# Altium PCB 第十二届直立摄像头.PcbDoc (part 3 of 3)
Units mil, origin at the board's own origin, x right, y up, seen from the top; angles counter-clockwise.
Board outline 3925 x 2095 mil, 2 copper layers (Top Layer, Bottom Layer); 127 components, 103 nets, 557 pads, 326 vias.
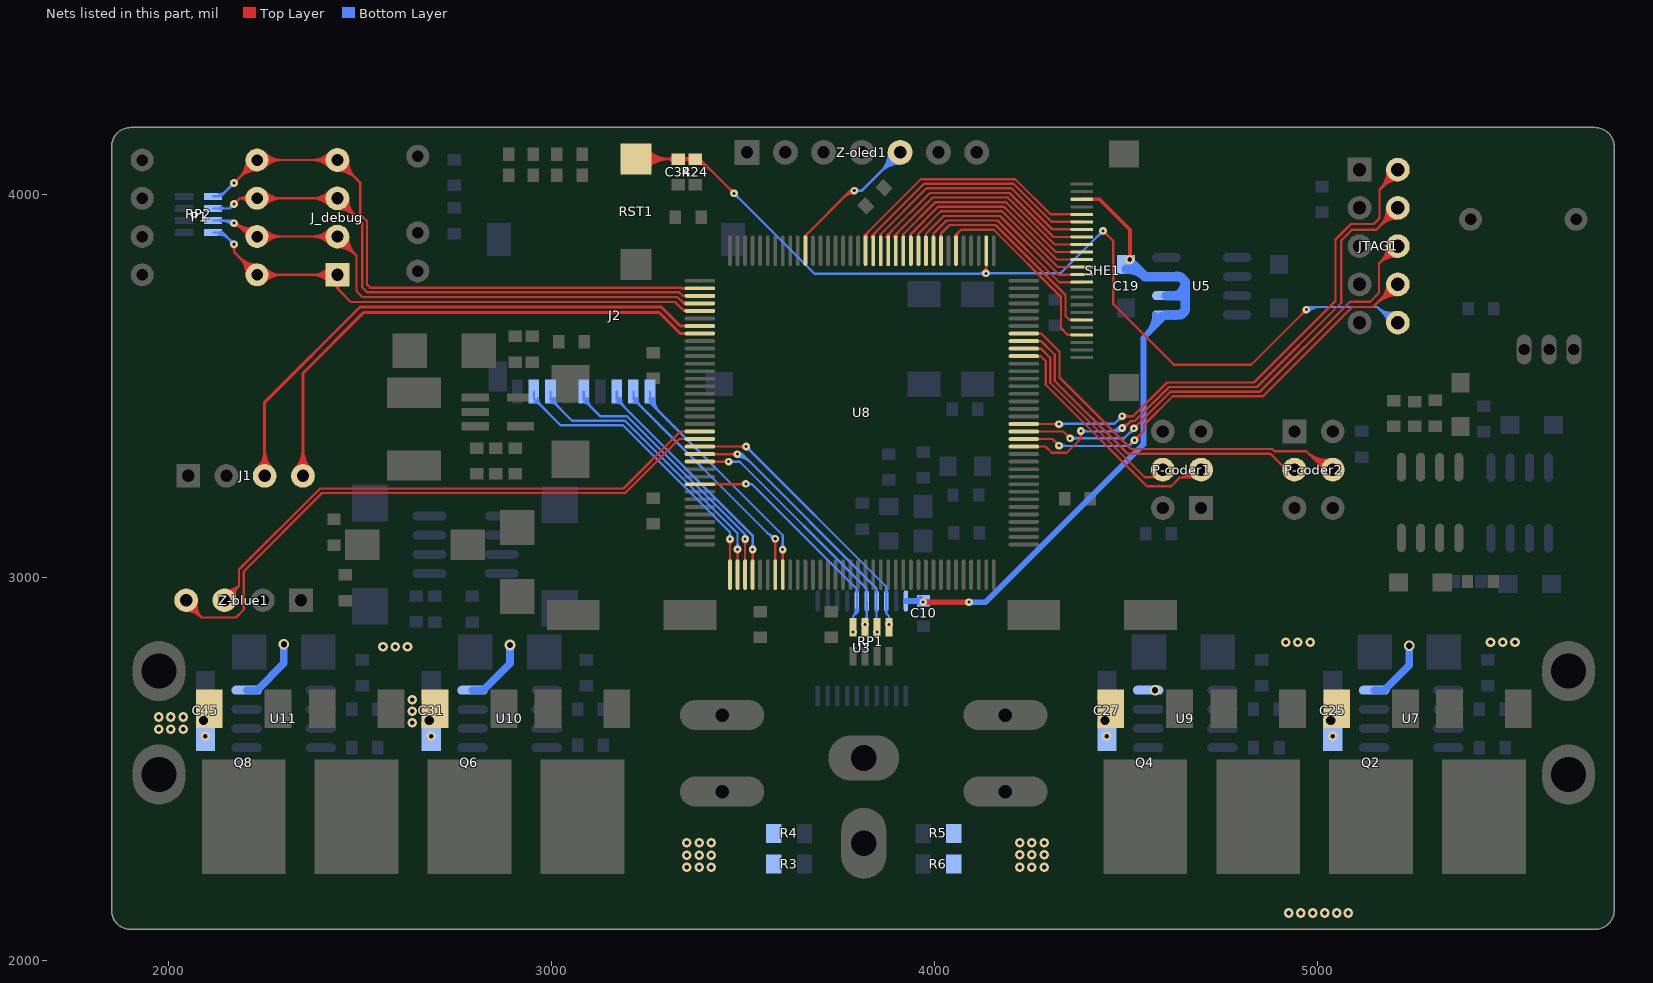
[diagram p3: the nets of this part, all layers, seen from the top]

## Via types
v1: diameter 31.5, hole 19.68, Top Layer to Bottom Layer, 160 vias
v2: diameter 25, hole 12, Top Layer to Bottom Layer, 66 vias
v3: diameter 20, hole 8, Top Layer to Bottom Layer, 61 vias
v4: diameter 40, hole 24, Top Layer to Bottom Layer, 20 vias
v5: diameter 28, hole 16, Top Layer to Bottom Layer, 14 vias
v6: diameter 12, hole 8, Top Layer to Bottom Layer, 3 vias
v7: diameter 39.37, hole 39.37, Top Layer to Bottom Layer, 2 vias

## Nets (pads, with @x,y where several pads share a name; then routed paths per layer and width w, separated by ;. In a path a pad name is that pad's centre, name@x,y a point inside that pad or via, vN(x,y) a via of type N, cw(c..) or ccw(c..) an arc to the next point about the centre after c; other vN are vias at no path point) (continued)
PA0_TCK: JTAG1.9 U8.50 | length 1768.7
  Top Layer w6: U8.50@4233.49,3341 U8.50@4233.07,3341.42 4289.58,3341.42 4306,3325 4345,3325 4382,3362 v3(4382,3382) ; v3@4377.05,3377.05 cw(c4365.1,3365.1) 4382,3365.1 cw(c4398.9,3365.1) v3@4386.95,3377.05 ; v3(4490,3390) 4495.13,3390 4513.13,3408 4523,3408 4612,3497 4842,3497 5062,3717 5062,3880 5090,3908 5154,3908 5197,3951 JTAG1.9@5211,3951 ; v3@4490,3391 ccw(c4490,3405.8) 4500.46,3395.33 ; v3@4490,3397 ccw(c4490,3426.28) 4510.71,3405.58 ; 5161.49,3915.49 ccw(c5111.99,3965) JTAG1.9@5182,3965 ; 5163.91,3917.91 cw(c5210,3871.82) JTAG1.9@5210,3937 ; 5171.74,3925.74 ccw(c5132.47,3965) JTAG1.9@5188,3965 ; 5174.15,3928.15 cw(c5210,3892.3) JTAG1.9@5210,3943 ; 5181.98,3935.98 ccw(c5152.96,3965) JTAG1.9@5194,3965 ; 5184.39,3938.39 cw(c5210,3912.79) JTAG1.9@5210,3949
  Bottom Layer w6: v3(4382,3382) 4383,3381 4481,3381 v3(4490,3390) ; v3@4386.95,3377.05 cw(c4396.49,3367.51) 4396.49,3381 ; v3@4386.95,3386.95 ccw(c4401.31,3401.31) 4401.31,3381 ; 4451.37,3381 ccw(c4451.37,3428.63) v3@4485.05,3394.95 ; 4465.86,3381 ccw(c4465.86,3414.14) v3@4489.29,3390.71 ; 4480.34,3381 ccw(c4480.34,3399.66) v3@4493.54,3386.46
PA1_TD1: JTAG1.7 U8.51 | length 1534.1
  Top Layer w6: U8.51@4233.07,3361.1 4307.9,3361.1 v3(4325,3344) ; v3@4318,3344 ccw(c4301.1,3344) 4313.05,3355.95 ccw(c4325,3367.9) v3@4325,3351 ; v3(4522,3358) 4547,3383 4547,3398 4622,3473 4858,3473 5091,3706 5145,3706 JTAG1.7@5207,3768 ; v3@4522,3365 ccw(c4522,3381.9) 4533.95,3369.95 ccw(c4545.9,3358) v3@4529,3358 ; 5151.96,3712.96 cw(c5210,3654.92) JTAG1.7@5210,3737 ; 5162.2,3723.2 cw(c5210,3675.4) JTAG1.7@5210,3743 ; 5166.44,3727.44 ccw(c5128.89,3765) JTAG1.7@5182,3765 ; 5172.44,3733.44 cw(c5210,3695.89) JTAG1.7@5210,3749 ; 5176.69,3737.69 ccw(c5149.37,3765) JTAG1.7@5188,3765 ; 5182.69,3743.69 cw(c5210,3716.37) JTAG1.7@5210,3755
  Bottom Layer w6: v3(4325,3344) 4326,3343 4507,3343 v3(4522,3358) ; v3@4329.95,3339.05 cw(c4339.49,3329.51) 4339.49,3343 ; v3@4329.95,3348.95 ccw(c4344.31,3363.31) 4344.31,3343 ; v3@4515,3358 cw(c4498.1,3358) 4510.05,3346.05 cw(c4522,3334.1) v3@4522,3351
PA2_TDO: JTAG1.8 U8.52 | length 1543.6
  Top Layer w6: U8.52@4233.07,3380.79 4336.21,3380.79 v3(4354,3363) ; v3@4347,3363 ccw(c4330.1,3363) 4342.05,3374.95 ccw(c4354,3386.9) v3@4354,3370 ; v3(4521,3389) 4617,3485 4850,3485 5085,3720 5138,3720 5161,3743 5161,3820 ; 5165.03,3824.03 ccw(c5124.06,3865) JTAG1.8@5182,3865 ; 5170.15,3829.15 cw(c5204.17,3795.13) JTAG1.8@5208.17,3843.08 ; 5175.27,3834.27 ccw(c5144.54,3865) JTAG1.8@5188,3865 ; 5179.3,3838.3 cw(c5205.58,3812.01) JTAG1.8@5208.67,3849.06 ; 5185.51,3844.51 ccw(c5165.03,3865) JTAG1.8@5194,3865 ; JTAG1.8@5207.67,3837.1 ccw(c5202.76,3778.24) 5161,3820 ; JTAG1.8@5208,3867 5161,3820
  Bottom Layer w6: v3(4354,3363) 4495,3363 v3(4521,3389) ; v3@4358.95,3358.05 cw(c4370.9,3346.1) 4370.9,3363 cw(c4370.9,3379.9) v3@4358.95,3367.95 ; v3@4514,3389 cw(c4497.1,3389) 4509.05,3377.05 cw(c4521,3365.1) v3@4521,3382
PA3_TMS: JTAG1.10 U8.53 | length 1707
  Top Layer w6: U8.53@4233.07,3400.47 v3@4325,3400.47 ; 4306.96,3400.47 cw(c4306.96,3381.96) v3@4320.05,3395.05 ; 4309.24,3400.47 ccw(c4309.24,3415.76) v3@4320.05,3404.95 ; v3(4490,3421) 4519.03,3421 4607.03,3509 4834,3509 5047,3722 5047,3882 5088,3923 5147,3923 5162,3938 5162,4012 ; v3@4494.95,3416.05 cw(c4506.9,3404.1) 4506.9,3421 cw(c4506.9,3437.9) v3@4494.95,3425.95 ; 5170.74,4020.74 cw(c5210,3981.47) JTAG1.10@5210,4037 ; 5171.61,4021.61 ccw(c5131.84,4061.38) JTAG1.10@5188.02,4063.98 ; 5180.98,4030.98 cw(c5210,4001.96) JTAG1.10@5210,4043 ; 5181.22,4031.22 ccw(c5150.2,4062.23) JTAG1.10@5194.02,4064.26 ; JTAG1.10@5182.03,4063.7 cw(c5113.47,4060.53) 5162,4012 ; JTAG1.10@5211,4051 5201,4051 5162,4012
  Bottom Layer w6: v3(4325,3400) 4326,3401 4470,3401 v3(4490,3421) ; v3@4329.95,3395.05 cw(c4344.31,3380.69) 4344.31,3401 ; v3@4329.95,3404.95 ccw(c4339.49,3414.49) 4339.49,3401 ; v3@4483,3421 cw(c4466.1,3421) 4478.05,3409.05 cw(c4490,3397.1) v3@4490,3414
PA10_FTM2_CH0: P-coder1.2 U8.62 | length 836.5
  Top Layer w6: U8.62@4233.07,3577.64 4277.36,3577.64 4290,3565 4290,3503.09 4555.09,3238 4618,3238 4640.5,3260.5 ; 4647.37,3260.5 ccw(c4647.37,3287.58) P-coder1.2@4674.2,3283.95 ; 4654.23,3260.5 ccw(c4654.23,3286.65) P-coder1.2@4680.14,3283.14 ; 4661.1,3260.5 ccw(c4661.1,3285.72) P-coder1.2@4686.09,3282.34 ; 4667.96,3260.5 ccw(c4667.96,3284.79) P-coder1.2@4692.04,3281.54 ; P-coder1.2@4668.25,3284.75 cw(c4640.5,3288.5) 4640.5,3260.5 ; P-coder1.2@4695.5,3260.5 4640.5,3260.5
PA11_CODER2DIR: P-coder1.5 U8.63 | length 540.3
  Top Layer w6: U8.63@4233.07,3597.32 4277.68,3597.32 4302,3573 4302,3508.06 4549.06,3261 P-coder1.5@4596,3261
PA12_FTM1_CH0: P-coder2.2 U8.64 | length 894.6
  Top Layer w6: U8.64@4233.07,3617.01 4277.99,3617.01 4314,3581 4314,3513.03 4504.03,3323 4877,3323 P-coder2.2@4940,3260
PA13_CODER1DIR: P-coder2.5 U8.65 | length 1287.4
  Top Layer w6: U8.65@4233.07,3636.69 4278.31,3636.69 4326,3589 4326,3522.13 4513.13,3335 4881.97,3335 4887.97,3329 4971,3329 ; 4979.19,3320.81 ccw(c5025.23,3366.84) P-coder2.5@5036.27,3302.68 ; 4987.38,3312.62 ccw(c5027.63,3352.86) P-coder2.5@5037.29,3296.77 ; 4995.58,3304.42 ccw(c5030.04,3338.89) P-coder2.5@5038.3,3290.86 ; 5003.77,3296.23 ccw(c5032.44,3324.91) P-coder2.5@5039.32,3284.94 ; 5007.05,3292.95 cw(c4995.1,3281) P-coder2.5@5012,3281 ; P-coder2.5@5035.25,3308.59 cw(c5022.82,3380.82) 4971,3329 ; P-coder2.5@5040,3260 4971,3329
PC10_I2C1_SCL: J1.3 U8.115 | length 1627.1
  Top Layer w8: J1.3@2230.91,3284.09 ccw(c2184.82,3330.18) 2250,3330.18 ccw(c2315.18,3330.18) J1.3@2269.09,3284.09 ; J1.3@2236.56,3278.44 ccw(c2204.13,3310.87) 2250,3310.87 ccw(c2295.87,3310.87) J1.3@2263.44,3278.44 ; J1.3@2250,3265 2250,3457 2499,3706 3286,3706 3335.62,3656.38 U8.115@3386.93,3656.38
PC11_I2C1_SDA: J1.4 U8.116 | length 1568.1
  Top Layer w8: J1.4@2330.91,3284.09 ccw(c2284.82,3330.18) 2350,3330.18 ccw(c2415.18,3330.18) J1.4@2369.09,3284.09 ; J1.4@2336.56,3278.44 ccw(c2304.13,3310.87) 2350,3310.87 ccw(c2395.87,3310.87) J1.4@2363.44,3278.44 ; J1.4@2350,3265 2350,3533 2509,3692 3280.2,3692 3335.51,3636.69 U8.116@3386.93,3636.69
PCLK: SHE1.21 U8.78 | length 560.2
  Top Layer w6: U8.78@4052.06,3888.07 cw(c4059.29,3888.07) 4054.18,3893.18 ; U8.78@4056.06,3853.07 4056.06,3895.06 4069,3908 4154.36,3908 4330,3732.36 4330,3651 4347.85,3633.15 SHE1.21@4384.69,3633.15 ; U8.78@4058.06,3888.07 cw(c4079.77,3888.07) 4064.42,3903.42
PD2_UART2_RX: U8.129 Z-blue1.3 | length 1569.7
  Top Layer w6: Z-blue1.3@2145,2960 2165,2960 2183,2978 ; Z-blue1.3@2148.84,2961.66 ccw(c2153.98,2990.73) 2174.86,2969.86 ccw(c2195.73,2948.98) Z-blue1.3@2166.66,2943.84 ; Z-blue1.3@2149.88,2967.57 ccw(c2156.43,3004.56) 2183,2978 ; Z-blue1.3@2172.57,2944.88 cw(c2209.56,2951.43) 2183,2978 ; U8.129@3386.93,3380.79 3335.79,3380.79 3187,3232 2395.03,3232 2183,3019.97 2183,2978
PD3_UART2_TX: U8.130 Z-blue1.4 | length 1786.6
  Top Layer w6: Z-blue1.4@2045,2912 cw(c2045,2856.47) 2084.26,2895.74 ; Z-blue1.4@2045,2918 cw(c2045,2876.96) 2074.02,2905.98 ; Z-blue1.4@2050,2930 2085,2895 ; Z-blue1.4@2060.74,2937.12 ccw(c2089.51,2931.85) 2068.83,2911.17 ; Z-blue1.4@2066.64,2936.04 ccw(c2103.18,2929.35) 2076.91,2903.09 ; Z-blue1.4@2072.54,2934.96 ccw(c2116.85,2926.85) 2085,2895 ; U8.130@3386.93,3361.1 3333.07,3361.1 3191.97,3220 2400,3220 2195,3015 2195,2915 2175,2895 2085,2895
PD4_TPM0_CH4: RP1.2 U3.18 U8.131 | length 841.4
  Top Layer w6: U8.131@3386.93,3341.42 v3(3507.58,3341.42) ; v3@3502.63,3336.47 ccw(c3490.68,3324.52) 3490.68,3341.42 ccw(c3490.68,3358.32) v3@3502.63,3346.37
  Bottom Layer w6: v3@3507.58,3334.42 cw(c3507.58,3317.52) 3519.53,3329.47 cw(c3531.48,3341.42) v3@3514.58,3341.42 ; v3(3507.58,3341.42) 3873.82,2975.18 U3.18@3873.82,2938.03 3873.82,2905.18 3881,2898 v3(3881,2877) ; U3.18@3871.76,2914.32 cw(c3866.8,2909.36) 3873.82,2909.36 cw(c3880.83,2909.36) U3.18@3875.87,2914.32 ; U3.18@3871.76,2961.74 ccw(c3866.8,2966.7) 3873.82,2966.7 ccw(c3880.83,2966.7) U3.18@3875.87,2961.74 ; v3@3876.05,2881.95 ccw(c3864.1,2893.9) 3881,2893.9 ccw(c3897.9,2893.9) v3@3885.95,2881.95
PD5_TPM0_CH5: RP1.4 U3.17 U8.132 | length 888.6
  Top Layer w6: U8.132@3386.93,3321.73 v3(3484.73,3321.73) ; v3@3479.78,3316.78 ccw(c3467.83,3304.83) 3467.83,3321.73 ccw(c3467.83,3338.63) v3@3479.78,3326.68
  Bottom Layer w6: v3@3484.73,3314.73 cw(c3484.73,3267.57) 3518.08,3300.92 ; v3@3484.73,3320.73 cw(c3484.73,3288.05) 3507.84,3311.16 ; v3(3484.73,3321.73) 3497.27,3321.73 ; v3@3484.73,3326.73 cw(c3484.73,3308.54) 3497.6,3321.4 ; v3@3490.69,3318.06 cw(c3497.27,3314.01) 3497.27,3321.73 ; v3@3490.69,3325.4 ccw(c3497.27,3329.46) 3497.27,3321.73 ; v3@3844.05,2861.95 ccw(c3833.96,2872.04) 3848.23,2872.04 ; U3.17@3846.17,2914.32 cw(c3841.21,2909.36) 3848.23,2909.36 cw(c3855.24,2909.36) U3.17@3850.28,2914.32 ; U3.17@3846.17,2961.74 ccw(c3841.21,2966.7) 3848.23,2966.7 ccw(c3855.24,2966.7) U3.17@3850.28,2961.74 ; 3848.23,2875.76 ccw(c3867.76,2875.76) v3@3853.95,2861.95 ; v3(3849,2857) 3848.23,2857.77 U3.17@3848.23,2938.03 3848.23,2970.77 3497.27,3321.73
PD6_TPM0_CH6: RP1.6 U3.16 U8.133 | length 779.7
  Top Layer w6: U8.133@3386.93,3302.05 v3(3462,3302) v3(3462,3302) ; 3444.98,3302.05 cw(c3444.98,3284.98) v3@3457.05,3297.05 ; 3445.22,3302.05 ccw(c3445.22,3318.78) v3@3457.05,3306.95
  Bottom Layer w6: v3(3462,3302) 3491,3302 3822,2971 3822,2938.67 U3.16@3822.64,2938.03 3822.64,2881.64 v3(3818,2877) ; v3@3466.95,3297.05 cw(c3478.9,3285.1) 3478.9,3302 cw(c3478.9,3318.9) v3@3466.95,3306.95 ; v3@3813.05,2881.95 ccw(c3789.9,2905.1) 3822.64,2905.1 ; v3@3817.29,2877.71 ccw(c3804.39,2890.61) 3822.64,2890.61 ; U3.16@3820.58,2914.32 cw(c3815.62,2909.36) 3822.64,2909.36 cw(c3829.65,2909.36) U3.16@3824.69,2914.32 ; 3822,2968.24 ccw(c3831.19,2968.24) U3.16@3824.69,2961.74
PD7_TPM0_CH7: RP1.8 U3.15 U8.136 | length 767.4
  Top Layer w6: U8.136@3386.93,3242.99 v3@3507,3242.99 ; 3487.67,3242.99 ccw(c3487.67,3263.33) v3@3502.05,3248.95 ; 3492.53,3242.99 cw(c3492.53,3229.53) v3@3502.05,3239.05
  Bottom Layer w6: v3@3507,3242.99 3523.01,3242.99 ; v3@3511.95,3239.05 cw(c3521.47,3229.53) 3521.47,3242.99 ; v3@3512.6,3248.2 ccw(c3523.01,3255.99) 3523.01,3242.99 ; v3@3782.05,2861.95 ccw(c3770.1,2873.9) 3787,2873.9 ccw(c3803.9,2873.9) v3@3791.95,2861.95 ; v3(3787,2857) 3787,2898 ; U3.15@3794.14,2916.26 cw(c3769.71,2915.29) 3787,2898 ; U3.15@3794.99,2914.32 cw(c3790.03,2909.36) 3797.05,2909.36 cw(c3804.06,2909.36) U3.15@3799.1,2914.32 ; U3.15@3794.99,2961.74 ccw(c3790.03,2966.7) 3797.05,2966.7 ccw(c3804.06,2966.7) U3.15@3799.1,2961.74 ; 3796.69,2907.69 ccw(c3788.36,2916.03) U3.15@3800.14,2916.5 ; 3523.01,3242.99 3797.05,2968.95 U3.15@3797.05,2938.03 3797.05,2908.05 3787,2898
  other v3: 3507,3244
PGND: C25.2 C27.2 C31.2 C45.2 Q2.3 Q4.3 Q6.3 Q8.3 R3.1 R4.1 R5.1 R6.1 U7.4 U9.4 U10.4 U11.4 | length 520.9
  Bottom Layer w20: U11.4@2203,2705 2230,2705 2300,2775 v5(2300,2825) ; U10.4@2793,2705 2821,2705 2891,2775 v5(2891,2823) ; U7.4@5148,2705 5175,2705 5240,2770 v5(5240,2821)
  other v2: 4925,2123 4956,2123 4988,2123 5019,2123 5050,2123 5081,2123 3353,2242 3385,2242 3417,2242 4222,2243 4254,2243 4286,2243 3353,2274 3385,2274 3417,2274 4222,2275 4254,2275 4286,2275 3353,2306 3385,2306 3417,2306 4222,2307 4254,2307 4286,2307 2095,2585 2685,2585 4450,2585 5040,2585 1973,2603 2005,2603 2037,2603 2635,2620 1973,2635 2005,2635 2037,2635 2635,2650 2635,2680 2559,2818 2591,2818 2623,2818 4917,2830 4949,2830 4981,2830 5452,2830 5484,2830 5516,2830
  other v4: 2090,2626 2680,2626 4445,2626 5035,2626
  other v5: 4576,2705
PTB0: SHE1.14 U8.81 | length 513.4
  Top Layer w6: U8.81@3997.01,3853.07 3997.01,3898.01 4031,3932 4164.3,3932 4325.35,3770.94 SHE1.14@4384.69,3770.94
PTB1: SHE1.13 U8.82 | length 534.5
  Top Layer w6: U8.82@3977.32,3853.07 3977.32,3897.32 4024,3944 4171,3944 4324.37,3790.63 SHE1.13@4384.69,3790.63
PTB2: SHE1.12 U8.83 | length 556.1
  Top Layer w6: U8.83@3957.64,3853.07 3957.64,3897.64 4016,3956 4175.97,3956 4321.66,3810.32 SHE1.12@4384.69,3810.32
PTB3: SHE1.11 U8.84 | length 577.2
  Top Layer w6: U8.84@3937.95,3853.07 3937.95,3896.98 4008.97,3968 4180.94,3968 4318.94,3830 SHE1.11@4384.69,3830
PTB4: SHE1.10 U8.85 | length 598.3
  Top Layer w6: U8.85@3918.27,3853.07 3918.27,3896.27 4002,3980 4185.91,3980 4316.23,3849.68 SHE1.10@4384.69,3849.68
PTB5: SHE1.9 U8.86 | length 644
  Top Layer w6: U8.86@3894.58,3888.07 cw(c3903.06,3888.07) 3897.07,3894.07 ; U8.86@3898.58,3853.07 3898.58,3895.58 3995,3992 4190.88,3992 4313.51,3869.37 SHE1.9@4384.69,3869.37 ; U8.86@3900.58,3888.07 cw(c3923.55,3888.07) 3907.31,3904.31
PTB6: SHE1.8 U8.87 | length 666.9
  Top Layer w6: U8.87@3874.9,3888.07 cw(c3884.14,3888.07) 3877.6,3894.6 ; U8.87@3878.9,3853.07 3878.9,3895.9 3987,4004 4195.85,4004 4310.8,3889.06 SHE1.8@4384.69,3889.06 ; U8.87@3880.9,3888.07 cw(c3904.62,3888.07) 3887.85,3904.85
PTB7: SHE1.7 U8.88 | length 662.7
  Top Layer w6: U8.88@3859.21,3853.07 3859.21,3896.21 3979,4016 4200.82,4016 4308.08,3908.74 SHE1.7@4384.69,3908.74
PTC5_K1: J_debug.4 P1.8 RP2.1 U8.110 | length 2671.2
  Top Layer w6: v3(2170,4030) P1.8@2230,4090 J_debug.4@2440,4090 2500,4030 2500,3946.97 2517,3929.97 2517,3765 2525.8,3756.2 3337.77,3756.2 3338.97,3755 U8.110@3378.59,3755 ; v3@2170,4037 ccw(c2170,4053.9) 2181.95,4041.95 ccw(c2193.9,4030) v3@2177,4030 ; P1.8@2203,4090 cw(c2137.82,4090) 2183.91,4043.91 cw(c2230,3997.82) P1.8@2230,4063 ; P1.8@2209,4090 cw(c2158.3,4090) 2194.15,4054.15 cw(c2230,4018.3) P1.8@2230,4069 ; P1.8@2215,4090 cw(c2178.79,4090) 2204.39,4064.39 cw(c2230,4038.79) P1.8@2230,4075 ; P1.8@2240.61,4079.39 cw(c2266.21,4053.79) 2266.21,4090 cw(c2266.21,4126.21) P1.8@2240.61,4100.61 ; P1.8@2244.85,4075.15 cw(c2280.7,4039.3) 2280.7,4090 cw(c2280.7,4140.7) P1.8@2244.85,4104.85 ; P1.8@2249.09,4070.91 cw(c2295.18,4024.82) 2295.18,4090 cw(c2295.18,4155.18) P1.8@2249.09,4109.09 ; J_debug.4@2420.2,4070.2 ccw(c2372.4,4022.4) 2372.4,4090 ccw(c2372.4,4157.6) J_debug.4@2420.2,4109.8 ; J_debug.4@2424.44,4074.44 ccw(c2386.89,4036.89) 2386.89,4090 ccw(c2386.89,4143.11) J_debug.4@2424.44,4105.56 ; J_debug.4@2428.69,4078.69 ccw(c2401.37,4051.37) 2401.37,4090 ccw(c2401.37,4128.63) J_debug.4@2428.69,4101.31 ; J_debug.4@2440,4062 cw(c2440,3994.4) 2487.8,4042.2 cw(c2535.6,4090) J_debug.4@2468,4090 ; J_debug.4@2440,4068 cw(c2440,4014.89) 2477.56,4052.44 cw(c2515.11,4090) J_debug.4@2462,4090 ; J_debug.4@2440,4074 cw(c2440,4035.37) 2467.31,4062.69 cw(c2494.63,4090) J_debug.4@2456,4090 ; 3346.62,3755 cw(c3346.62,3749.5) U8.110@3350.52,3753.39 ; U8.110@3378.59,3755 3377.59,3756 U8.110@3386.93,3754.8 U8.110@3385.13,3753 ; U8.110@3378.59,3755 3380.59,3753 U8.110@3385.13,3753 ; U8.110@3378.59,3755 3383.13,3755 U8.110@3385.13,3753
  Bottom Layer w6: RP2.1@2115,3995 2135,3995 v3(2170,4030) ; RP2.1@2130.16,4000.86 ccw(c2130.16,4026.69) 2148.42,4008.42 ; v3@2163,4030 cw(c2146.1,4030) 2158.05,4018.05 cw(c2170,4006.1) v3@2170,4023
PTC6_K2: J_debug.3 P1.7 RP2.3 U8.111 | length 2392.4
  Top Layer w6: v3(2170,3975) 2185,3990 ; v3@2170,3982 ccw(c2170,3998.9) 2181.95,3986.95 ccw(c2193.9,3975) v3@2177,3975 ; P1.7@2206.18,3977.3 ccw(c2185,3966) 2185,3990 ; P1.7@2206.18,4002.7 cw(c2185,4014) 2185,3990 ; P1.7@2211.47,3980.12 ccw(c2195,3971.34) 2195,3990 ccw(c2195,4008.66) P1.7@2211.47,3999.88 ; P1.7@2240.61,3979.39 cw(c2266.21,3953.79) 2266.21,3990 cw(c2266.21,4026.21) P1.7@2240.61,4000.61 ; P1.7@2244.85,3975.15 cw(c2280.7,3939.3) 2280.7,3990 cw(c2280.7,4040.7) P1.7@2244.85,4004.85 ; P1.7@2249.09,3970.91 cw(c2295.18,3924.82) 2295.18,3990 cw(c2295.18,4055.18) P1.7@2249.09,4009.09 ; J_debug.3@2420.2,3970.2 ccw(c2372.4,3922.4) 2372.4,3990 ccw(c2372.4,4057.6) J_debug.3@2420.2,4009.8 ; J_debug.3@2424.44,3974.44 ccw(c2386.89,3936.89) 2386.89,3990 ccw(c2386.89,4043.11) J_debug.3@2424.44,4005.56 ; J_debug.3@2428.69,3978.69 ccw(c2401.37,3951.37) 2401.37,3990 ccw(c2401.37,4028.63) J_debug.3@2428.69,4001.31 ; J_debug.3@2440,3962 cw(c2440,3894.4) 2487.8,3942.2 cw(c2535.6,3990) J_debug.3@2468,3990 ; J_debug.3@2440,3968 cw(c2440,3914.89) 2477.56,3952.44 cw(c2515.11,3990) J_debug.3@2462,3990 ; J_debug.3@2440,3974 cw(c2440,3935.37) 2467.31,3962.69 cw(c2494.63,3990) J_debug.3@2456,3990 ; U8.111@3386.93,3735.12 3341.88,3735.12 3332.8,3744.2 2517.8,3744.2 2505,3757 2505,3925 J_debug.3@2440,3990 P1.7@2230,3990 2185,3990
  Bottom Layer w6: RP2.3@2115,3963.5 2158.5,3963.5 ; RP2.3@2134.3,3959.36 cw(c2144.3,3949.36) 2144.3,3963.5 cw(c2144.3,3977.65) RP2.3@2134.3,3967.65 ; v3@2163,3974.81 cw(c2147.63,3974.38) 2158.5,3963.5 ; v3@2169.81,3968 ccw(c2169.38,3952.63) 2158.5,3963.5 ; v3(2170,3975) 2158.5,3963.5
PTC7_K3: J_debug.2 P1.6 RP2.5 U8.112 | length 2536.1
  Top Layer w6: v3@2170,3918 cw(c2170,3889.03) 2190.49,3909.51 ; v3@2170,3924 cw(c2170,3909.51) 2180.24,3919.76 ; v3(2170,3925) v3@2175,3925 ; v3@2171.81,3918.24 cw(c2178.39,3893.67) 2191.11,3915.7 ; v3@2176.76,3926.81 ccw(c2184.84,3928.98) 2180.66,3921.73 ; 2181.56,3918.44 ccw(c2208.87,3945.74) P1.6@2222.55,3909.64 ; 2188.13,3911.87 ccw(c2212.47,3936.22) P1.6@2224.68,3904.03 ; 2194.69,3905.31 ccw(c2216.08,3926.7) P1.6@2226.81,3898.42 ; 2198.05,3901.95 cw(c2186.1,3890) P1.6@2203,3890 ; 2201.25,3898.75 ccw(c2219.69,3917.19) P1.6@2228.94,3892.81 ; P1.6@2220.43,3915.25 cw(c2205.26,3955.25) v3@2175,3925 ; P1.6@2240.61,3879.39 cw(c2266.21,3853.79) 2266.21,3890 cw(c2266.21,3926.21) P1.6@2240.61,3900.61 ; P1.6@2244.85,3875.15 cw(c2280.7,3839.3) 2280.7,3890 cw(c2280.7,3940.7) P1.6@2244.85,3904.85 ; P1.6@2249.09,3870.91 cw(c2295.18,3824.82) 2295.18,3890 cw(c2295.18,3955.18) P1.6@2249.09,3909.09 ; J_debug.2@2420.2,3870.2 ccw(c2372.4,3822.4) 2372.4,3890 ccw(c2372.4,3957.6) J_debug.2@2420.2,3909.8 ; J_debug.2@2424.44,3874.44 ccw(c2386.89,3836.89) 2386.89,3890 ccw(c2386.89,3943.11) J_debug.2@2424.44,3905.56 ; J_debug.2@2428.69,3878.69 ccw(c2401.37,3851.37) 2401.37,3890 ccw(c2401.37,3928.63) J_debug.2@2428.69,3901.31 ; J_debug.2@2440,3862 cw(c2440,3794.4) 2487.8,3842.2 cw(c2535.6,3890) J_debug.2@2468,3890 ; J_debug.2@2440,3868 cw(c2440,3814.89) 2477.56,3852.44 cw(c2515.11,3890) J_debug.2@2462,3890 ; J_debug.2@2440,3874 cw(c2440,3835.37) 2467.31,3862.69 cw(c2494.63,3890) J_debug.2@2456,3890 ; 3335.95,3724.05 ccw(c3351.93,3740.03) U8.112@3351.93,3717.43 ; 3346.19,3713.81 ccw(c3351.93,3719.55) U8.112@3351.93,3711.43 ; U8.112@3386.93,3715.43 3344.57,3715.43 3327.8,3732.2 2505,3732.2 2490,3747.2 2490,3840 J_debug.2@2440,3890 P1.6@2230,3890 2210,3890 v3@2175,3925
  Bottom Layer w6: RP2.5@2115,3932.01 2167.99,3932.01 2175,3925 v3(2170,3925) ; RP2.5@2134.3,3927.87 cw(c2144.3,3917.87) 2144.3,3932.01 cw(c2144.3,3946.15) RP2.5@2134.3,3936.15 ; RP2.5@2136.18,3932.01 cw(c2136.18,3891.18) v3@2165.05,3920.05 ; 2150.67,3932.01 cw(c2150.67,3905.67) v3@2169.29,3924.29
PTC8_K4: J_debug.1 P1.5 RP2.7 U8.113 | length 2272.2
  Top Layer w6: v3@2165.05,3865.05 cw(c2153.1,3853.1) 2170,3853.1 cw(c2186.9,3853.1) v3@2174.95,3865.05 ; v3(2170,3870) 2170,3850 P1.5@2230,3790 J_debug.1@2440,3790 2440,3754 ; P1.5@2203,3790 ccw(c2137.82,3790) 2183.91,3836.09 ccw(c2230,3882.18) P1.5@2230,3817 ; P1.5@2209,3790 ccw(c2158.3,3790) 2194.15,3825.85 ccw(c2230,3861.7) P1.5@2230,3811 ; P1.5@2215,3790 ccw(c2178.79,3790) 2204.39,3815.61 ccw(c2230,3841.21) P1.5@2230,3805 ; P1.5@2240.61,3779.39 cw(c2266.21,3753.79) 2266.21,3790 cw(c2266.21,3826.21) P1.5@2240.61,3800.61 ; P1.5@2244.85,3775.15 cw(c2280.7,3739.3) 2280.7,3790 cw(c2280.7,3840.7) P1.5@2244.85,3804.85 ; P1.5@2249.09,3770.91 cw(c2295.18,3724.82) 2295.18,3790 cw(c2295.18,3855.18) P1.5@2249.09,3809.09 ; J_debug.1@2420.2,3770.2 ccw(c2372.4,3722.4) 2372.4,3790 ccw(c2372.4,3857.6) J_debug.1@2420.2,3809.8 ; J_debug.1@2424.44,3774.44 ccw(c2386.89,3736.89) 2386.89,3790 ccw(c2386.89,3843.11) J_debug.1@2424.44,3805.56 ; J_debug.1@2428.69,3778.69 ccw(c2401.37,3751.37) 2401.37,3790 ccw(c2401.37,3828.63) J_debug.1@2428.69,3801.31 ; J_debug.1@2433.11,3762.86 cw(c2430.86,3754) 2440,3754 ; J_debug.1@2446.89,3762.86 ccw(c2449.14,3754) 2440,3754 ; 3337.12,3703.88 ccw(c3351.93,3718.7) U8.113@3351.93,3697.75 ; 3346.49,3696 cw(c3346.49,3690.31) U8.113@3350.52,3694.33 ; U8.113@3386.93,3695.75 3386.68,3696 3345,3696 3322,3719 2475,3719 2440,3754
  Bottom Layer w6: RP2.7@2115,3900.51 2139.49,3900.51 ; RP2.7@2130.16,3894.65 cw(c2130.16,3857.99) 2156.09,3883.91 ; RP2.7@2130.16,3900.65 cw(c2130.16,3878.47) 2145.84,3894.16 ; RP2.7@2135.43,3897.97 cw(c2139.49,3896.01) 2139.49,3900.51 ; RP2.7@2135.43,3903.06 ccw(c2139.49,3905.01) 2139.49,3900.51 ; v3@2163,3870 ccw(c2146.1,3870) 2158.05,3881.95 ccw(c2170,3893.9) v3@2170,3877 ; v3(2170,3870) 2139.49,3900.51
PTE0: J2.8 U8.1 | length 879.7
  Top Layer w6: v3@3460.56,3094.54 cw(c3448.61,3082.59) 3465.51,3082.59 cw(c3482.41,3082.59) v3@3470.46,3094.54 ; U8.1@3465.51,3006.93 v3(3465.51,3099.49)
  Bottom Layer w6: J2.8@2953.31,3456.5 cw(c2953.31,3431.91) 2970.7,3449.3 ; J2.8@2953.31,3485 2953.31,3466.69 3023,3397 3186.09,3397 3465.51,3117.58 v3(3465.51,3099.49) ; J2.8@2964.09,3467.28 ccw(c2991.54,3467.28) 2972.13,3447.87 ; v3@3460.56,3104.44 ccw(c3448.61,3116.39) 3465.51,3116.39 ccw(c3482.41,3116.39) v3@3470.46,3104.44
PTE1: J2.7 U8.2 | length 868
  Top Layer w6: v3@3480.25,3067.85 cw(c3468.3,3055.9) 3485.2,3055.9 cw(c3502.1,3055.9) v3@3490.15,3067.85 ; U8.2@3485.2,3006.93 v3(3485.2,3072.8)
  Bottom Layer w6: J2.7@2996.61,3456.5 cw(c2996.61,3435.06) 3011.78,3450.22 ; J2.7@2996.61,3485 2996.61,3465.39 3053,3409 3191.06,3409 3485.2,3114.86 v3(3485.2,3072.8) ; J2.7@3001.39,3467.28 ccw(c3017.51,3467.28) J2.7@3006.12,3455.88 ; J2.7@3007.39,3467.28 ccw(c3038,3467.28) 3016.36,3445.64 ; v3@3480.25,3077.75 ccw(c3468.3,3089.7) 3485.2,3089.7 ccw(c3502.1,3089.7) v3@3490.15,3077.75
PTE2: J2.5 U8.3 | length 791.9
  Top Layer w6: v3@3499.93,3094.93 cw(c3487.98,3082.98) 3504.88,3082.98 cw(c3521.78,3082.98) v3@3509.83,3094.93 ; U8.3@3504.88,3006.93 v3(3504.88,3099.88)
  Bottom Layer w6: J2.5@3083.23,3456.5 cw(c3083.23,3438.96) 3095.64,3451.36 ; J2.5@3083.23,3485 3083.23,3463.77 3126,3421 3196.03,3421 3504.88,3112.15 ; J2.5@3088.01,3467.28 ccw(c3108.02,3467.28) 3093.87,3453.13 ; J2.5@3094.01,3467.28 ccw(c3128.51,3467.28) 3104.11,3442.89 ; v3@3501.32,3105.91 ccw(c3497.64,3112.15) 3504.88,3112.15 ; v3(3504.88,3099.88) 3504.88,3112.15 ; v3@3508.44,3105.91 cw(c3512.13,3112.15) 3504.88,3112.15
PTE3: J2.3 U8.4 | length 734
  Top Layer w6: v3@3519.62,3067.62 cw(c3507.67,3055.67) 3524.57,3055.67 cw(c3541.47,3055.67) v3@3529.52,3067.62 ; U8.4@3524.57,3006.93 v3(3524.57,3072.57)
  Bottom Layer w6: J2.3@3169.84,3456.5 cw(c3169.84,3438.03) 3182.91,3451.09 ; J2.3@3169.84,3485 3169.84,3464.16 3524.57,3109.43 v3(3524.57,3072.57) ; J2.3@3174.62,3467.28 ccw(c3193.71,3467.28) J2.3@3180.21,3453.79 ; J2.3@3180.62,3467.28 ccw(c3214.19,3467.28) 3190.45,3443.55 ; v3@3519.62,3077.52 ccw(c3507.67,3089.47) 3524.57,3089.47 ccw(c3541.47,3089.47) v3@3529.52,3077.52
PTE4: J2.2 U8.7 | length 748.9
  Top Layer w6: v3@3578.67,3095.67 cw(c3566.72,3083.72) 3583.62,3083.72 cw(c3600.52,3083.72) v3@3588.57,3095.67 ; U8.7@3583.62,3006.93 v3(3583.62,3100.62)
  Bottom Layer w6: J2.2@3213.15,3456.5 cw(c3213.15,3433.94) 3229.1,3449.9 ; J2.2@3213.15,3485 3213.15,3465.85 3578.38,3100.62 v3(3583.62,3100.62) ; J2.2@3217.93,3467.28 ccw(c3232.93,3467.28) J2.2@3222.32,3456.68 ; J2.2@3223.93,3467.28 ccw(c3253.41,3467.28) 3232.56,3446.44 ; 3562.72,3116.28 ccw(c3583.62,3137.18) v3@3583.62,3107.62 ; 3572.96,3106.04 ccw(c3583.62,3116.7) v3@3583.62,3101.62
PTE5: J2.1 U8.8 | length 761.7
  Top Layer w6: v3@3598.05,3067.05 cw(c3585.36,3054.36) 3603.31,3054.36 ; U8.8@3603.31,3006.93 v3@3603.31,3070.69 ; 3603.31,3055.84 cw(c3619.16,3055.84) v3@3607.95,3067.05
  Bottom Layer w6: J2.1@3255.24,3467.28 ccw(c3278.22,3467.28) 3261.97,3451.03 ; J2.1@3256.46,3485 3256.46,3456.54 3603,3110 v3(3603,3072) ; J2.1@3261.24,3467.28 ccw(c3298.7,3467.28) 3272.21,3440.79 ; J2.1@3267.24,3467.28 ccw(c3319.19,3467.28) 3282.45,3430.55 ; v3@3598.05,3076.95 ccw(c3586.1,3088.9) 3603,3088.9 ccw(c3619.9,3088.9) v3@3607.95,3076.95
RESET: C34.1 JTAG1.6 R24.1 RST1.1 U8.74 | length 3758.2
  Top Layer w6: RST1.1@3220,4092.8 3374.2,4092.8 R24.1@3375,4092 3387,4092 v3(3476,4003) ; RST1.1@3233.44,4079.36 cw(c3265.87,4046.93) 3265.87,4092.8 cw(c3265.87,4138.67) RST1.1@3233.44,4106.23 ; RST1.1@3237.68,4075.12 cw(c3280.36,4032.44) 3280.36,4092.8 cw(c3280.36,4153.15) RST1.1@3237.68,4110.47 ; RST1.1@3241.92,4070.88 cw(c3294.84,4017.96) 3294.84,4092.8 cw(c3294.84,4167.64) RST1.1@3241.92,4114.72 ; RST1.1@3246.16,4066.63 cw(c3309.33,4003.47) 3309.33,4092.8 cw(c3309.33,4182.12) RST1.1@3246.16,4118.96 ; 3296.61,4092.8 cw(c3296.61,4061.11) C34.1@3319.01,4083.51 ; 3300.45,4092.8 ccw(c3300.45,4119.05) C34.1@3319.01,4100.49 ; 3311.09,4092.8 cw(c3311.09,4075.59) C34.1@3323.26,4087.76 ; C34.1@3336.74,4087.76 cw(c3348.91,4075.59) 3348.91,4092.8 ; C34.1@3340.99,4083.51 cw(c3363.39,4061.11) R24.1@3363.39,4092.8 ; C34.1@3340.99,4100.49 ccw(c3359.55,4119.05) R24.1@3359.55,4092.8 ; C34.1@3341.61,4092.8 cw(c3341.61,4061.11) R24.1@3364.01,4083.51 ; C34.1@3345.45,4092.8 ccw(c3345.45,4119.05) R24.1@3364.01,4100.49 ; 3356.09,4092.8 cw(c3356.09,4075.59) R24.1@3368.26,4087.76 ; R24.1@3361.74,4097.3 cw(c3349.15,4103.51) 3352.78,4089.95 cw(c3354.91,4082) R24.1@3362.07,4086.07 ; R24.1@3361.94,4086.31 ccw(c3346.08,4077.76) 3350.75,4095.15 ccw(c3353.76,4106.39) R24.1@3362.98,4099.31 ; R24.1@3377.5,4080 cw(c3377.5,4028.09) 3414.2,4064.8 ; R24.1@3377.5,4086 cw(c3377.5,4048.58) 3403.96,4075.04 ; R24.1@3377.5,4092 cw(c3377.5,4069.07) 3393.72,4085.28 ; v3@3469,4003 ccw(c3452.1,4003) 3464.05,4014.95 ccw(c3476,4026.9) v3@3476,4010 ; v3@4129.05,3798.95 ccw(c4115.16,3812.84) 4134.8,3812.84 ; v3@4134.8,3794 U8.74@4134.8,3853.07 ; 4134.8,3808.96 ccw(c4148.96,3808.96) v3@4138.95,3798.95 ; v3@4440,3898 cw(c4440,3881.1) 4451.95,3893.05 cw(c4463.9,3905) v3@4447,3905 ; v3(4440,3905) 4467,3878 4467,3713 4625,3555 4827,3555 v3(4971,3699) ; v3@4964,3699 cw(c4947.1,3699) 4959.05,3687.05 cw(c4971,3675.1) v3@4971,3692
  Bottom Layer w6: v3@3476,3996 cw(c3476,3979.1) 3487.95,3991.05 cw(c3499.9,4003) v3@3483,4003 ; v3(3476,4003) 3686,3793 v3@4134,3793 ; 4114.69,3793 ccw(c4114.69,3813.31) v3@4129.05,3798.95 ; 4119.51,3793 cw(c4119.51,3779.51) v3@4129.05,3789.05 ; v3(4134,3794) 4329,3794 v3(4440,3905) ; v3@4138.95,3789.05 cw(c4150.9,3777.1) 4150.9,3794 cw(c4150.9,3810.9) v3@4138.95,3798.95 ; v3@4433,3905 cw(c4416.1,3905) 4428.05,3893.05 cw(c4440,3881.1) v3@4440,3898 ; v3(4971,3699) 4978,3706 5156,3706 ; v3@4971.71,3698.29 cw(c4990.31,3679.69) 4990.31,3706 ; v3@4975.95,3694.05 cw(c5004.8,3665.2) 5004.8,3706 ; 5163.66,3698.34 ccw(c5195.11,3729.78) JTAG1.6@5205.07,3686.44 ; 5171.33,3690.67 ccw(c5197.97,3717.32) JTAG1.6@5206.42,3680.59 ; 5171.39,3690.61 cw(c5145.79,3665) JTAG1.6@5182,3665 ; 5178.99,3683.01 ccw(c5200.84,3704.86) JTAG1.6@5207.76,3674.75 ; 5181.64,3680.36 cw(c5166.27,3665) JTAG1.6@5188,3665 ; JTAG1.6@5203.73,3692.29 cw(c5192.25,3742.24) 5156,3706 ; JTAG1.6@5210,3665 5197,3665 5156,3706
RST_OLED: U8.98 Z-oled1.5 | length 736
  Top Layer w6: U8.98@3662.36,3853.07 3662.36,3892.36 3780,4010 v3(3790,4010) ; U8.98@3664.36,3888.07 cw(c3679.55,3888.07) 3668.81,3898.81 ; 3760.98,3990.98 cw(c3790,3961.96) v3@3790,4003 ; 3771.22,4001.22 cw(c3790,3982.44) v3@3790,4009
  Bottom Layer w6: v3(3790,4010) 3810,4010 Z-oled1.5@3910,4110 ; v3@3794.95,4005.05 cw(c3806.9,3993.1) 3806.9,4010 cw(c3806.9,4026.9) v3@3794.95,4014.95 ; Z-oled1.5@3880.5,4110 cw(c3809.28,4110) 3859.64,4059.64 cw(c3910,4009.28) Z-oled1.5@3910,4080.5 ; Z-oled1.5@3886.5,4110 cw(c3829.77,4110) 3869.88,4069.88 cw(c3910,4029.77) Z-oled1.5@3910,4086.5 ; Z-oled1.5@3892.5,4110 cw(c3850.25,4110) 3880.13,4080.13 cw(c3910,4050.25) Z-oled1.5@3910,4092.5
SCL: SHE1.6 U8.89 | length 708.2
  Top Layer w6: U8.89@3835.53,3888.07 cw(c3843.88,3888.07) 3837.97,3893.97 ; U8.89@3839.53,3853.07 3839.53,3895.53 3972,4028 4205.79,4028 4305.37,3928.43 SHE1.6@4384.69,3928.43 ; U8.89@3841.53,3888.07 cw(c3864.36,3888.07) 3848.22,3904.22
SDA: SHE1.5 U8.90 | length 735.3
  Top Layer w6: U8.90@3815.84,3888.07 cw(c3824.95,3888.07) 3818.51,3894.51 ; U8.90@3818.43,3889.48 ccw(c3814.63,3893.28) 3820,3893.28 ; U8.90@3819.84,3853.07 3820,3853.23 3820,3896 3964,4040 4210.76,4040 4302.65,3948.11 SHE1.5@4384.69,3948.11 ; U8.90@3821.84,3888.07 cw(c3845.43,3888.07) 3828.75,3904.75
VSYN: SHE1.19 U8.80 | length 556.8
  Top Layer w6: U8.80@4016.69,3853.07 4016.69,3897.69 4039,3920 4159.33,3920 4342,3737.33 4342,3682 4351.48,3672.52 SHE1.19@4384.69,3672.52
Z3V3: C10.2 C19.1 SHE1.3 U3.20 U5.5 U5.6 U5.7 | length 2064.9
  Top Layer w10: SHE1.3@4384.69,3987.48 4430.52,3987.48 4510,3908 4510,3840 v2@4517,3833 ; v2@4504.7,3835.3 ccw(c4491.89,3848.11) 4510,3848.11 ccw(c4528.11,3848.11) v2@4515.3,3835.3
  Top Layer w15: v3(3970,2935) v3(4090,2935)
  Bottom Layer w15: U3.20@3925,2938.03 3966.97,2938.03 v3(3970,2935) ; 3948.06,2938.03 ccw(c3948.06,2959.44) C10.2@3963.2,2944.3 ; 3952.73,2938.03 cw(c3952.73,2923.23) C10.2@3963.2,2933.7 ; C10.2@3956.65,2938.03 cw(c3956.65,2921.65) C10.2@3968.23,2933.23 ; C10.2@3958.83,2936.22 ccw(c3963.1,2943.61) C10.2@3968.44,2936.95 ; v3(4090,2935) 4132.73,2935 4545.5,3347.77 4545.5,3625.84 U5.5@4605.27,3685.61 ; 4554.22,3634.56 ccw(c4503.18,3685.61) U5.5@4575.37,3685.61 ; 4579.83,3660.17 ccw(c4554.39,3685.61) U5.5@4590.37,3685.61
  Bottom Layer w25: C19.1@4500.52,3804.51 cw(c4503.58,3739.79) 4549.39,3785.61 ; C19.1@4517,3818 4549.39,3785.61 ; U5.5@4605.27,3685.61 4643.61,3685.61 4655,3697 4655,3726 ; U5.6@4605.27,3735.61 4645.39,3735.61 4655,3726 ; U5.5@4630.86,3684.92 ccw(c4630.86,3714.03) 4651.44,3693.44 ; U5.6@4630.86,3736.29 cw(c4630.86,3702.87) 4654.5,3726.5 ; U5.7@4630.86,3786.3 cw(c4630.86,3762.52) 4647.67,3779.33 ; U5.6@4631.14,3734.98 ccw(c4614.35,3772) 4655,3772 ; 4549.39,3785.61 U5.7@4605.27,3785.61 4641.39,3785.61 4655,3772 ; 4655,3726 4655,3772
  other v2: 4510,3830
pads on no net: J2. J2.9 P-coder1.3 P-coder1.4 P-coder2.3 P-coder2.4 SHE1.1 SHE1.2 SHE1.15 SHE1.16 SHE1.17 SHE1.18 SHE1.20 SHE1.22 SHE1.23 SHE1.24 SHE1.25 SHE1.26 U1.8 U4.8 U5.8 U8.9 U8.10 U8.11 U8.12 U8.13 U8.14 U8.15 U8.19 U8.20 U8.23 U8.24 U8.25 U8.26 U8.27 U8.28 U8.29 U8.30 U8.35 U8.36 U8.38 U8.39 U8.40 U8.41 U8.45 U8.46 U8.47 U8.48 U8.49 U8.54 U8.55 U8.58 U8.59 U8.60 U8.61 U8.67 U8.68 U8.69 U8.73 U8.75 U8.76 U8.77 U8.79 U8.91 U8.92 U8.95 U8.96 U8.97 U8.103 U8.104 U8.105 U8.114 U8.117 U8.118 U8.119 U8.120 U8.123 U8.124 U8.125 U8.126 U8.127 U8.128 U8.137 U8.138 U8.139 U8.140 U8.141 U8.142 U8.143 U8.144 Y1.1
copper on no net:
  other v7: 2972.99,3898.39 3287.95,3898.39

## Polygon pours and split planes (outlines as drawn)
MGND on Top Layer "Top Layer-MGND" (solid, remove dead copper, pour order 6): 1850,4180 1850,2880 3410,2880 3680,2610 3940,2610 4210,2880 5775,2880 5775,4175 5770,4180
PGND on Top Layer "Top Layer-MGND 1" (solid, remove dead copper, pour order 10): 1850,2880 3410,2880 3680,2610 3940,2610 4210,2880 5775,2880 5780,2880 5780,2080 1850,2080
MGND on Bottom Layer "Bottom Layer-MGND" (solid, remove dead copper, pour order 8): 1850,4180 1850,2880 3410,2880 3680,2610 3940,2610 4210,2880 5775,2880 5780,2880 5780,4180
PGND on Bottom Layer "Bottom Layer-PGND" (solid, remove dead copper, pour order 14): 1850,2880 3410,2880 3680,2610 3940,2610 4210,2880 5780,2880 5780,2080 1850,2080

## Keep-outs
Keep-Out Layer:
  the board outline again, w10

## Other copper
Top Layer:
  text "2017/4/1" at 1872,2154 h35
  text "湖北工程学院春晖队" at 1883,2106 h47
Bottom Layer:
  rectangle net D7V2: 5326,2226 5543,2445
  rectangle net D7V2: 4735,2225 4954,2445
  rectangle net MGND: 3638,2224 3992,2358
  rectangle net D7V2: 2380,2225 2600,2445
  rectangle net D7V2: 2971,2226 3190,2445

## Silkscreen, mask and mechanical layers (free items; w line width, h text height)
Top Overlay:
  lines w10: 1759.01,2140.3 1779.01,2080.3 ; 1759.01,4111.46 1779.01,4171.46 ; 1769.01,2080.3 1789.01,2080.3 ; 1769.01,4171.46 1789.01,4171.46 ; 1779.01,2740 1779.01,2080.3 ; 1779.01,3511.76 1779.01,4171.46 ; 1799.01,2140.3 1779.01,2080.3 ; 1799.01,4111.46 1779.01,4171.46 ; 1846.59,4220 1846.59,4240 ; 1852,2880 3410,2880 3679,2611 3934,2611 ; 1906.59,4210 1846.59,4230 ; 1906.59,4250 1846.59,4230 ; 3528.17,4230 1846.59,4230 ; 3939,2611 4208,2880 5778,2880 ; 4090,4230 5771.59,4230 ; 5711.59,4210 5771.59,4230 ; 5711.59,4250 5771.59,4230 ; 5771.59,4220 5771.59,4240
  text "3925 (mil)" at 3538.17,4194.01 h60
  text "3V3" at 4930,4020 h45
  text "GND" at 3440,4005 h45
  text "5V" at 3580,4005 h45
  text "D0" at 3675,4005 h45
  text "DC" at 3975,4005 h45
  text "CS" at 4085,4005 h45
  text "3V3" at 4215,3975 h45
  text "GND" at 5030,3845 h45 r90
  text "C8_K4" at 2025,3620 h45 r270
  text "C7_K3" at 2130,3620 h45 r270
  text "C6_K2" at 2225,3620 h45 r270
  text "C5_K1" at 2330,3620 h45 r270
  text "REST" at 5135,3545 h45
  text "NC" at 4615,3440 h45
  text "GND" at 4865,3440 h45
  text "5V" at 5015,3440 h45
  text "DIR" at 5100,3330 h45 r270
  text "SCL" at 2185,3325 h45
  text "SDA" at 2325,3325 h45
  text "CLK" at 4755,3260 h45
  text "DIR" at 4535,3220 h45 r90
  text "5V" at 2005,3165 h45
  text "GND" at 2110,3165 h45
  text "5V" at 4546,3075 h45
  text "GND" at 4655,3075 h45
  text "NC" at 4950,3075 h45
  text "TX" at 1990,3015 h45
  text "RX" at 2100,3015 h45
  text "GND" at 2195,3015 h45
  text "IN3" at 1861,2903 h45 r270
  text "IN2" at 5760,2815 h45 r90
  text "2091.164 (mil)" at 1815,2750 h60 r90
  text "IN4" at 1860,2440 h45 r270
  text "IN1" at 5760,2335 h45 r90